# Altium PCB PCB_SX126x_Antenna.PcbDoc
Units mm, origin at the board's own origin, x right, y up, seen from the top; angles counter-clockwise.
Board outline 44 x 40.6 mm, 2 copper layers (Top Layer, Bottom Layer); 41 components, 32 nets, 124 pads, 204 vias.
Unrouted connection lines stored in the file: 4.
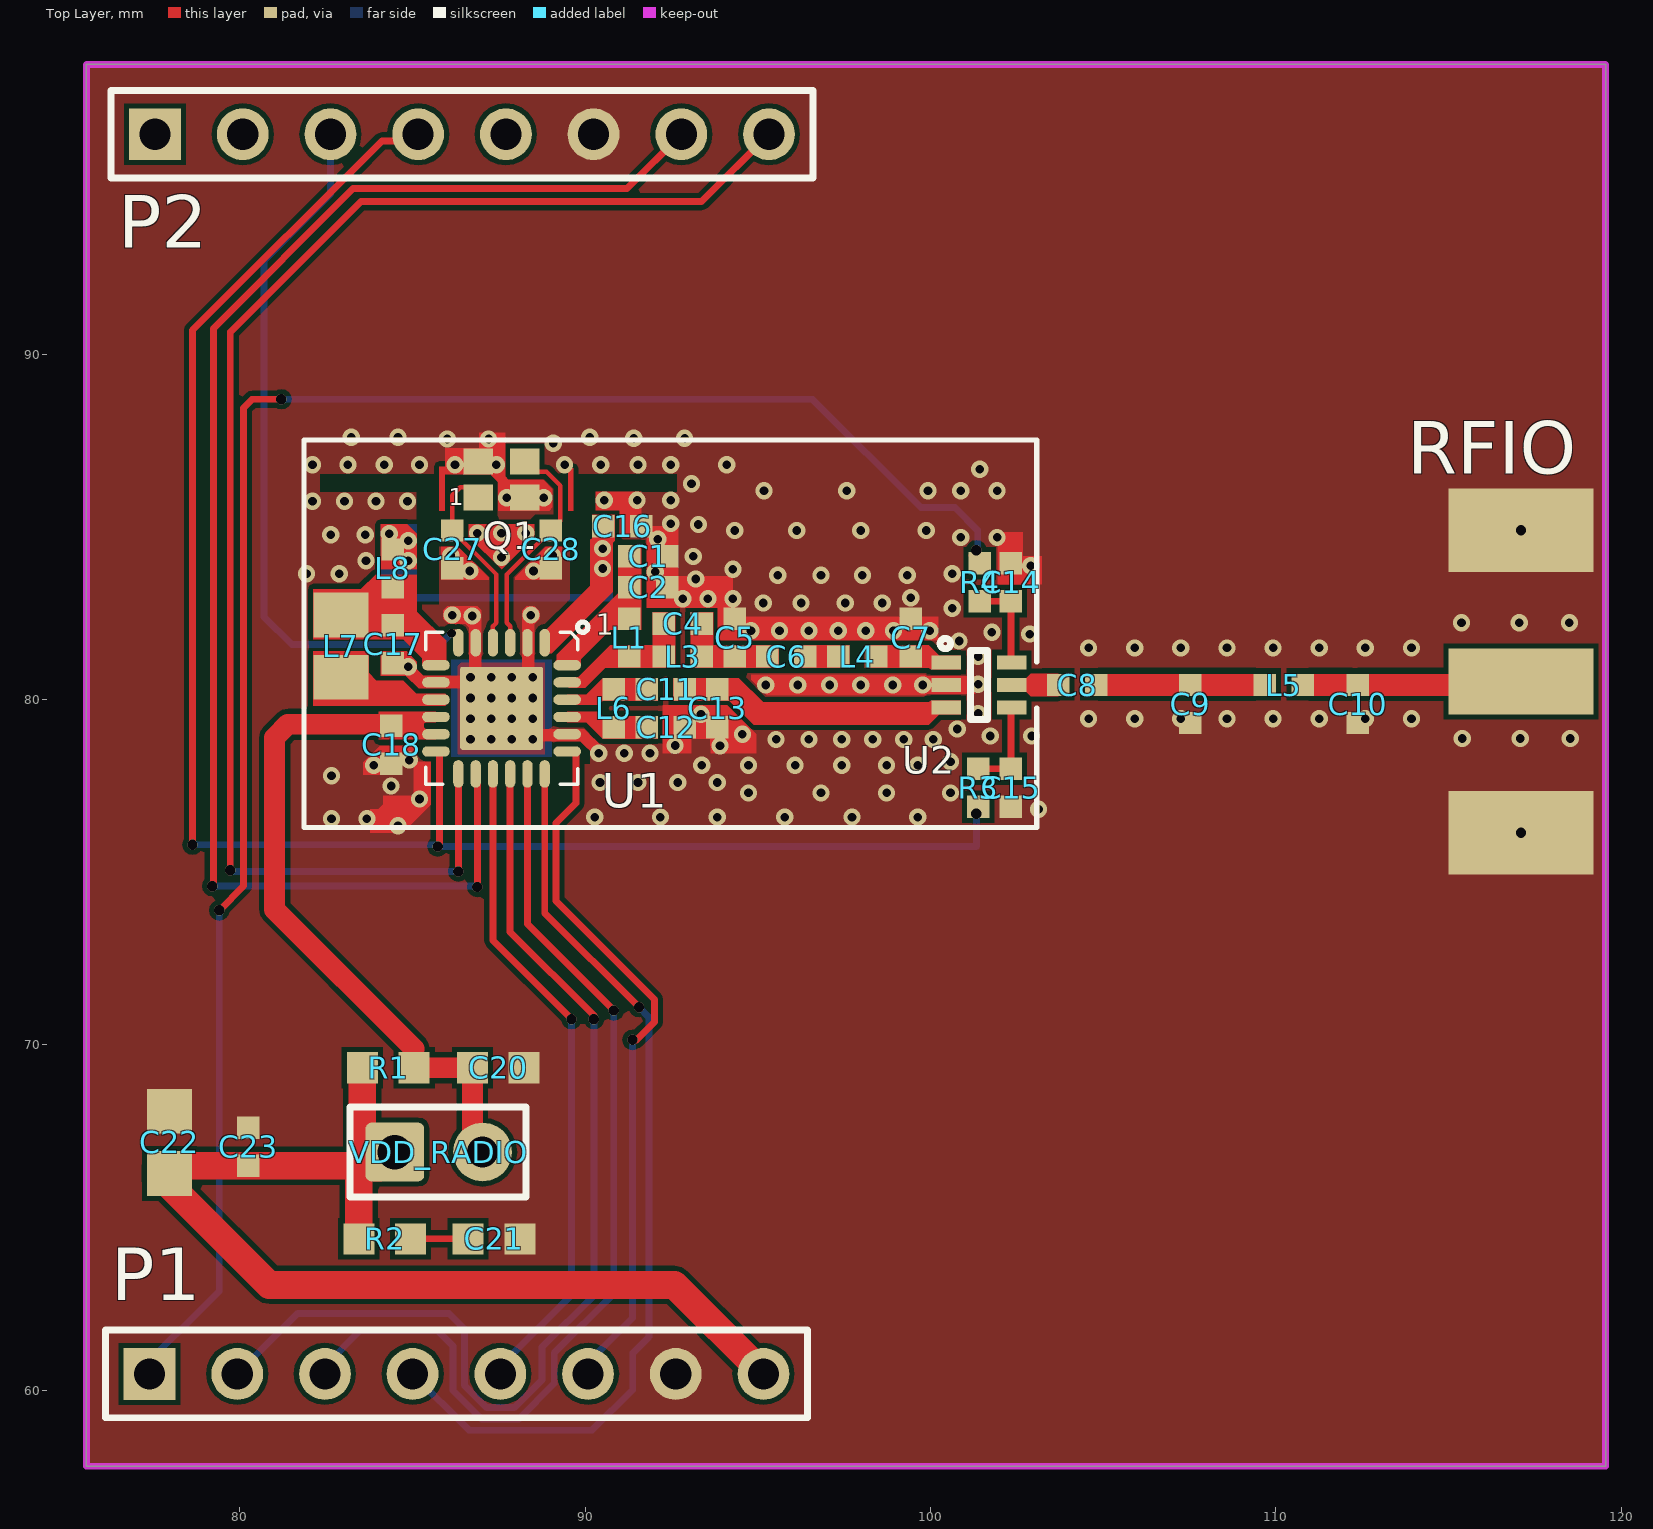
[diagram p0: Top Layer view]
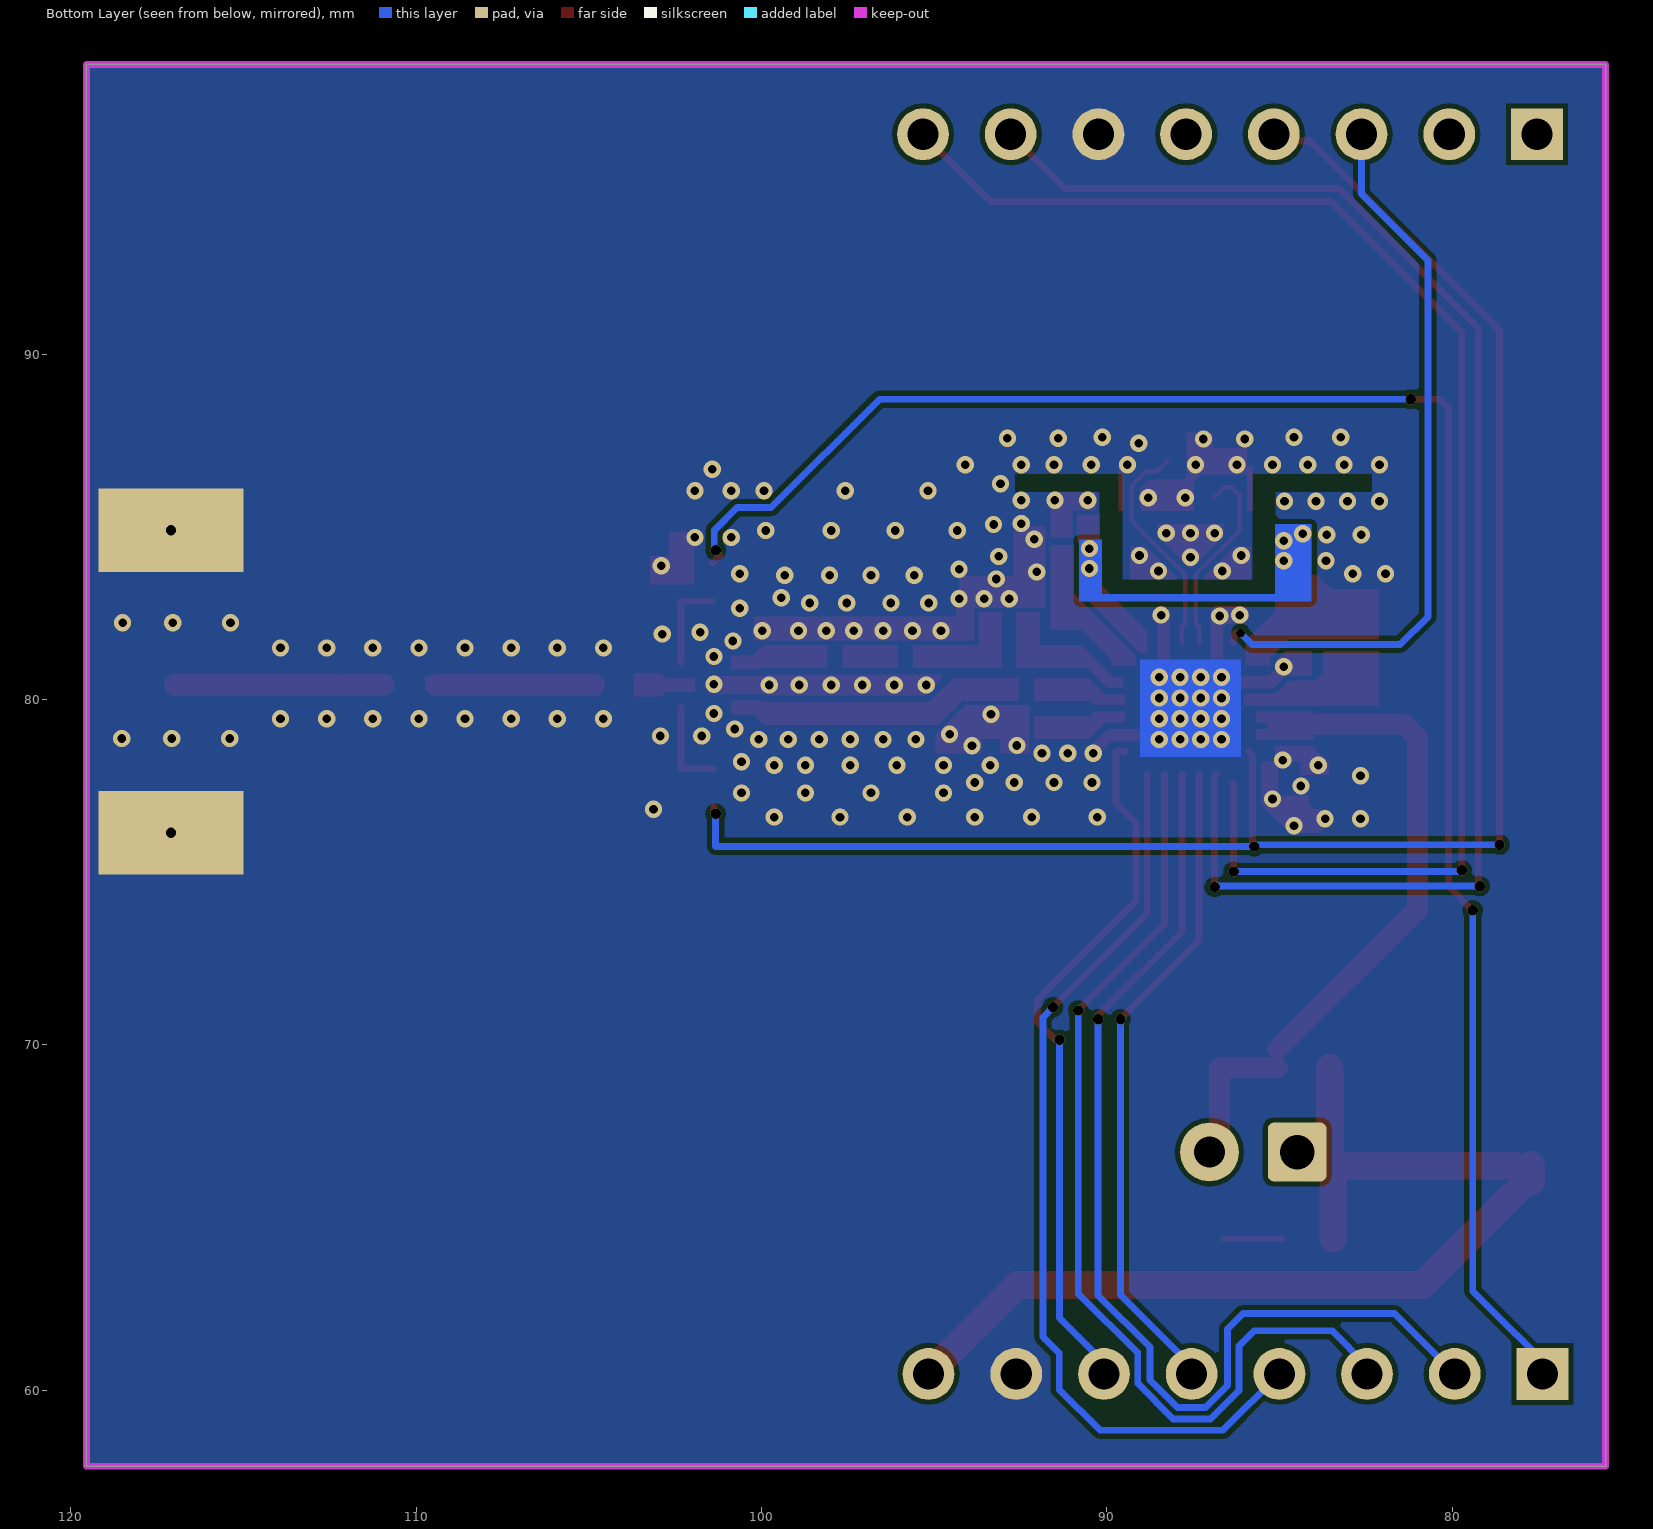
[diagram p1: Bottom Layer view, seen from below]

## Layer stack, top to bottom
Top Solder: solder mask 0.0102, Solder Resist, Dk 3.5
Top Layer: signal copper 0.0356
Dielectric 1: dielectric 0.32, FR-4, Dk 4.8
Bottom Layer: signal copper 0.0356
Bottom Solder: solder mask 0.0102, Solder Resist, Dk 3.5

## Board outline
75.55,57.8 75.55,98.4 119.55,98.4 119.55,57.8

## Design rules (kind name [scope] priority, off if disabled: settings)
Clearance sadasf [InNamedPolygon('Top Layer-No Net')] p1: gap=0.134 ignorepadtopadclearanceinfootprint=FALSE
Clearance sadfsfs [InNamedPolygon('Top Layer-No Net')] p2: gap=0.134 ignorepadtopadclearanceinfootprint=FALSE
Clearance dss [InNamedPolygon('NONET_L02_P002')] p3: gap=0.131 ignorepadtopadclearanceinfootprint=FALSE
Clearance dsds [InNamedPolygon('Top Layer-No Net')] p4: gap=0.254 ignorepadtopadclearanceinfootprint=FALSE except(0: Arc-Hole Track-Hole SMDPad-Hole THPad-Hole Via-Hole Fill-Hole Poly-Hole Region-Hole Text-Hole)
Clearance Clearance_RF_GND [InNet('GND') And OnLayer('Top Layer') And (InPoly) vs InNet('NetL*') or InNet('NetC*') or InNet('NetU*')] p5: gap=0.14 ignorepadtopadclearanceinfootprint=FALSE except(0: Arc-Hole Track-Hole SMDPad-Hole THPad-Hole Via-Hole Fill-Hole Poly-Hole Region-Hole Text-Hole)
Clearance Clearance_GND_Keepout [InNet('GND') vs OnLayer('Keep-Out Layer')] p6: gap=0.25 ignorepadtopadclearanceinfootprint=FALSE
Clearance Clearance_GND [InNet('GND')] p7: gap=0.14 ignorepadtopadclearanceinfootprint=FALSE except(0: Arc-Hole Track-Hole SMDPad-Hole THPad-Hole Via-Hole Fill-Hole Poly-Hole Region-Hole Text-Hole)
Clearance [All] p8: gap=0.127 ignorepadtopadclearanceinfootprint=FALSE
PolygonConnect dfsga [All vs IsNamedPolygon('GND_L02_P004')] p1: connectstyle=Direct reliefconductorwidth=0.254 reliefentries=4 polygonreliefangle="90 Angle" airgapwidth=0.254
PolygonConnect adg [All vs IsNamedPolygon('GND_L01_P003')] p2: connectstyle=Direct reliefconductorwidth=0.254 reliefentries=4 polygonreliefangle="90 Angle" airgapwidth=0.254
PolygonConnect asfdg [All vs IsNamedPolygon('Top Layer-No Net')] p3: connectstyle=Direct reliefconductorwidth=0.254 reliefentries=4 polygonreliefangle="90 Angle" airgapwidth=0.254
PolygonConnect PolygonConnect_1 [All vs IsNamedPolygon('NONET_L02_P002')] p4: connectstyle=Direct reliefconductorwidth=0.254 reliefentries=4 polygonreliefangle="90 Angle" airgapwidth=0.254
PolygonConnect sadf [All vs IsNamedPolygon('NONET_L01_P001')] p5: connectstyle=Direct reliefconductorwidth=0.254 reliefentries=4 polygonreliefangle="90 Angle" airgapwidth=0.254
PolygonConnect fdsad [All vs IsNamedPolygon('Top Layer-No Net')] p6: connectstyle=Direct reliefconductorwidth=0.254 reliefentries=4 polygonreliefangle="90 Angle" airgapwidth=0.254
PolygonConnect [All] p7: connectstyle=Relief reliefconductorwidth=0.254 reliefentries=4 polygonreliefangle="90 Angle" airgapwidth=0.254
RoutingVias [All] p1: holewidth=0.3 width=0.3 viastyle="Through Hole" minholewidth=0.3 minwidth=0.3 maxholewidth=0.4 maxwidth=0.4
SolderMaskExpansion [All] p1: expansion=0.102
Width Width_VCC [InNet('VDD_IN')] p1: maxlimit=2 minlimit=0.2 preferedwidth=0.8 minimp=50.000000 maximp=50.000000 favimp=50.000000
Width Width_All [All] p2: maxlimit=2 minlimit=0.127 preferedwidth=0.2 minimp=50.000000 maximp=50.000000 favimp=50.000000
Width Width_GND [InNet('GND')] p3: maxlimit=3 minlimit=0.2 preferedwidth=0.4 toplayer_minwidth=0.3 minimp=50.000000 maximp=50.000000 favimp=50.000000
30 further rules are at their usual default settings.

## Components (designator, comment, footprint, x,y, rotation, side; value= is the part's Value field where it differs from the comment)
C1 "Cap" RLC_402_SMD 91.825,84.15 r180 top value=NC
C2 "Cap" RLC_402_SMD 91.825,83.25 r180 top value=NC
C4 "Cap" RLC_402_SMD 92.825,82.2 r180 top value=NC
C5 "Cap" RLC_402_SMD 94.325,81.8 r270 top value=NC
C6 "Cap" RLC_402_SMD 95.825,81.25 r180 top value=NC
C7 "Cap" RLC_402_SMD 99.425,81.8 r270 top value=NC
C8 "Cap" rlc_402_smd 104.25,80.425 r180 top value=NC
C9 "Cap" rlc_402_smd 107.525,79.875 r90 top value=NC
C10 "Cap" rlc_402_smd 112.375,79.875 r90 top value=NC
C11 "Cap" RLC_402_SMD 92.325,80.3 r180 top value=NC
C12 "Cap" RLC_402_SMD 92.325,79.2 r180 top value=NC
C13 "Cap" RLC_402_SMD 93.825,79.75 r90 top value=NC
C14 "Cap" RLC_402_SMD 102.325,83.4 r90 top value=1nF
C15 "Cap" RLC_402_SMD 102.325,77.45 r270 top value=1nF
C16 "Cap" RLC_402_SMD 91.075,85.025 r180 top value=10nF
C17 "Cap" RLC_402_SMD 84.425,81.6 r90 top value=470nF
C18 "Cap" RLC_402_SMD 84.375,78.7 r90 top value=100nF
C20 "Cap" rlc_603_smd 87.481,69.341 r180 top value=1uF
C21 "Cap" rlc_603_smd 87.354,64.388 r180 top value=1uF
C22 "Cap" rlc_805_smd 77.956,67.182 r270 top value=10uF
C23 "Cap" rlc_402_smd 80.242,67.055 r270 top value=100nF
C27 "Cap" RLC_402_SMD 86.15,84.35 r90 top value=NC
C28 "Cap" RLC_402_SMD 89,84.35 r270 top value=NC
L1 "Inductor" RLC_402_SMD 91.275,81.8 r90 top value=0R
L3 "Inductor" RLC_402_SMD 92.825,81.25 r0 top value=0R
L4 "Inductor" RLC_402_SMD 97.875,81.25 r0 top value=0R
L5 "Inductor" rlc_402_smd 110.225,80.425 r0 top value=0R
L6 "Inductor" RLC_402_SMD 90.825,79.75 r90 top value=0R
L7 "Inductor" "rlc_805_smd enlarged" 82.925,81.55 r270 top value=15uH
L8 "Inductor" rlc_402_smd 84.425,83.8 r270 top value=47nH
P1 "Header 8" HDR1X8 77.38,60.475 r0 top
P2 "Header 8" HDR1X8 77.54,96.375 r0 top
Q1 "Xtal" ND2016DA 87.575,86.375 r0 top value=32.0MHz
R1 "Resistor" rlc_603_smd 84.294,69.341 r180 top value=NC
R2 "Resistor" rlc_603_smd 84.191,64.388 r180 top value=0R
R3 "Resistor" RLC_402_SMD 101.375,77.45 r270 top value=100R
R4 "Resistor" RLC_402_SMD 101.425,83.4 r90 top value=100R
RFIO "SMA" SMA_end_launch_1.0mm_9.52mm 117.1,80.525 r0 top
U1 "SX1261" VQFN24_4X4MM 87.575,79.75 r270 top
U2 "PE4259 RF Switch" SC70-6 101.4,80.425 r0 top
VDD_RADIO "Jumper" bridge_254mm 84.485,66.9 r0 top

## Footprints (in the part's own frame and the unit in brackets; to place one, negate y for a bottom-side part, rotate by r counter-clockwise, add the part's x,y. Pads: shape width x height; smd on the part's side, far side on the other; paste and mask are expansions set on the pad)
bridge_254mm [mm] "Generic Bridge 2.54mm, 2 Leads 0.9mm;"
  rrect20% 1.7x1.7 hole 1 paste-2539.97 mask+0.05: 1(0,0)
  round 1.7 hole 0.9 paste-2539.97 mask+0.05: 2(2.54,0)
  silkscreen extent -1.3,-1.3 3.8,1.3
HDR1X8 [mm] "Connector; Header; 8 Position"
  rect 1.5x1.5 hole 0.9: 1(0,0)
  round 1.5 hole 0.9: 2(2.54,0) 3(5.08,0) 4(7.62,0) 5(10.16,0) 6(12.7,0) 7(15.24,0) 8(17.78,0)
  silkscreen extent -1.27,-1.27 19.05,1.27
ND2016DA [mm] "Crystal SMD 2.0x1.6mm"
  rect 0.85x0.75 smd mask+0.05: 1(-0.675,-0.525) 2(0.675,-0.525) 3(0.675,0.525) 4(-0.675,0.525)
  body extent -1,-0.8 1,0.8, height 1
RLC_402_SMD [mm] "Chip SMD component 402; Body 1.0 x 0.5 mm (LxW typ)"
  rect 0.65x0.65 smd mask+0.05: 1(-0.55,0) 2(0.55,0)
  body extent -0.87,-0.33 0.87,0.33, height 0.8
rlc_402_smd [mm] "Chip SMD component 402; Body 1.0 x 0.5 mm (LxW typ)"
  rect 0.65x0.65 smd mask+0.05: 1(-0.55,0) 2(0.55,0)
  body extent -0.87,-0.33 0.87,0.33, height 0.8
rlc_603_smd [mm] "Chip SMD component 603; Body 1.6 x 0.8mm (LxW typ)"
  rect 0.9x0.9 smd paste+0 mask+0.05: 1(-0.75,0) 2(0.75,0)
rlc_805_smd [mm] "Chip SMD component 805; Body 2.0 x 1.25 mm (LxW typ)"
  rect 1.3x1.3 smd mask+0.05: 1(-0.9,0) 2(0.9,0)
"rlc_805_smd enlarged" [mm] "Chip SMD component 805; Body 2.0 x 1.25 mm (LxW typ)"
  rect 1.3x1.6 smd mask+0.05: 1(-0.9,0) 2(0.9,0)
SC70-6 [mm] "SC70 6-Leads, Body 2.0x1.25mm, Pitch 0.65mm"
  rect 0.85x0.4 smd mask+0.05: 1(-0.95,0.65) 2(-0.95,0) 3(-0.95,-0.65) 4(0.95,-0.65) 5(0.95,0) 6(0.95,0.65)
  silkscreen extent -1.12,-1 0.25,1.35, body extent -0.63,-1 0.63,1, height 1.45
SMA_end_launch_1.0mm_9.52mm [mm] "SMA end launch for 1.0mm PCB thickness; 9.52mm"
  rect 4.2x1.905 smd mask+0.05: 1(0,0)
  rect 4.2x2.413 hole 0.3 mask+0.05: 2(0,-4.38) 2(0,4.38)
VQFN24_4X4MM [mm] "24 Leads, Body 4.0x4.0mm, Pitch 0.50mm, VQFN24"
  oval 0.8x0.3 smd mask+0.05: 1(-1.9,1.25) 2(-1.9,0.75) 3(-1.9,0.25) 4(-1.9,-0.25) 5(-1.9,-0.75) 6(-1.9,-1.25) 13(1.9,-1.25) 14(1.9,-0.75) 15(1.9,-0.25) 16(1.9,0.25) 17(1.9,0.75) 18(1.9,1.25)
  oval 0.3x0.8 smd mask+0.05: 7(-1.25,-1.9) 8(-0.75,-1.9) 9(-0.25,-1.9) 10(0.25,-1.9) 11(0.75,-1.9) 12(1.25,-1.9) 19(1.25,1.9) 20(0.75,1.9) 21(0.25,1.9) 22(-0.25,1.9) 23(-0.75,1.9) 24(-1.25,1.9)
  rrect5% 2.4x2.4 smd paste-2.5 mask+0.05: 25(0,0)
  Mechanical 15 keep-out lines w0.1: 2.5,-2.5 2.5,2.5 -2.5,2.5 -2.5,-2.5 2.5,-2.5
  silkscreen extent -2.5,-2.2 2.2,2.5, body extent -2,-2 2,2, height 1

## Part data
C1 C2 C4 C5 C6 C7 C8 C9 C10 C11 C12 C13 C14 C15 C16 C17 C18 C20 C21 C22 C23 C27 C28: "Capacitor SMD", LatestRevisionDate="05-oct-2007  -  Semtech", LatestRevisionNote="Re-released for DXP Platform.", Published=8-Jun-2000, Publisher="Altium Limited"
L1 L3 L4 L5 L6 L7 L8: "Inductor SMD", Code_IEC=1005, Code_JEITA=0402, LatestRevisionDate="05-oct-2007  -  Semtech", LatestRevisionNote="Re-released for DXP Platform.", Published=8-Jun-2000, Publisher="Altium Limited"
P1 P2: "Header, 8-Pin", LatestRevisionDate=17-Jul-2002, LatestRevisionNote="Re-released for DXP Platform.", Publisher="Altium Limited"
Q1: library part "Xtal GND", "Crystal with GND pins", LatestRevisionDate="05-oct-2007  -  Semtech"
R1 R2 R3 R4: "Resistor SMD - IEC symbol version", LatestRevisionDate="27-Jul-20  -  Semtech"
RFIO: "SMA Straight Connector", LatestRevisionDate="05-oct-2007  -  Semtech", LatestRevisionNote="Re-released for DXP Platform.", Publisher="Altium Limited"
U1: library part SX126x, "SX1261/2 - Ultra low power RF transceiver"
U2: "PE4259 Peregrine RF Switch", LatestRevisionDate="03-Sep-2012 -  Semtech"
VDD_RADIO: "Jumper Wire", LatestRevisionDate="05-oct-2007  -  Semtech"

## Via types
v1: diameter 0.5, hole 0.25, Top Layer to Bottom Layer, tented both sides, 172 vias
v2: diameter 0.5, hole 0.25, Top Layer to Bottom Layer, tented top, 16 vias
v3: diameter 0.3, hole 0.3, Top Layer to Bottom Layer, 15 vias
v4: diameter 0.25, hole 0.25, Top Layer to Bottom Layer, tented both sides, 1 vias

## Nets (pads, with @x,y where several pads share a name; then routed paths per layer and width w, separated by ;. In a path a pad name is that pad's centre, name@x,y a point inside that pad or via, vN(x,y) a via of type N, cw(c..) or ccw(c..) an arc to the next point about the centre after c; other vN are vias at no path point)
ANT_SW: P1.1 R4.2 | length 54.2
  Top Layer w0.2: v3(79.4,73.9) 80.1,74.6 80.1,88.45 80.35,88.7 v3(81.2,88.7) ; v3(101.324,84.324) 101.324,84.299 101.2,84.175 R4.2
  Bottom Layer w0.2: P1.1 77.065,60.16 76.875,60.35 79.4,62.875 v3(79.4,73.9) ; v3(81.2,88.7) 96.582,88.7 99.722,85.56 100.708,85.56 101.365,84.903 101.365,84.365 v3(101.324,84.324)
BUSY: P2.7 U1.14 | length 43
  Top Layer w0.2: v3(79.2,74.6) 79.227,74.627 79.227,90.752 83.275,94.8 91.205,94.8 P2.7 ; U1.14 86.875,77.8 v3(86.875,74.575)
  Bottom Layer w0.2: v3(79.2,74.6) 86.85,74.6 v3(86.875,74.575)
DIO1: P2.8 U1.13 | length 42.7
  Top Layer w0.2: v3(79.719,75.056) 79.719,90.644 83.5,94.425 93.37,94.425 P2.8 ; v3(86.325,75.025) U1.13@86.325,77.575
  Bottom Layer w0.2: v3(79.719,75.056) 79.75,75.025 v3(86.325,75.025)
DIO2: P2.4 R3.2 U1.12 | length 50.5
  Top Layer w0.2: v3(78.625,75.8) 78.625,90.7 84.11,96.185 84.97,96.185 P2.4 ; v3(85.725,75.75) 85.775,75.8 85.775,78.4 U1.12@85.875,78.5 ; v3(101.325,76.7) 101.375,76.75 R3.2
  Bottom Layer w0.2: v3(78.625,75.8) 85.675,75.8 v3(85.725,75.75) 101.325,75.75 v3(101.325,76.7)
DIO3: P2.3 U1.6 | length 21.1
  Top Layer w0.2: v4(86.124,81.929) 86.269,81.929 86.325,81.873 U1.6
  Bottom Layer w0.2: P2.3 82.62,94.645 80.7,92.725 80.7,82.4 81.5,81.6 85.795,81.6 v4(86.124,81.929)
GND: C1.1 C2.1 C5.1 C7.1 C9.1 C10.1 C12.1 C13.1 C14.2 C15.2 C16.1 C17.1 C18.1 C20.1 C21.1 C22.1 C23.1 C27.1 C28.2 P1.7 P2.6 Q1.2 Q1.4 RFIO.2 U1.2 U1.5 U1.8 U1.20 U1.25 U2.2 | length 4.1
  Top Layer w0.3: U1.8 U1.25@86.675,80.5 ; U1.25@86.825,80.6 U1.5 ; U1.25@88.325,80.65 U1.2 ; U1.25@88.475,78.95 88.525,79 U1.20
  other v1: 84.575,76.35 82.65,76.55 83.675,76.55 90.275,76.6 92.175,76.6 93.825,76.6 95.775,76.6 97.725,76.6 99.625,76.6 103.125,76.825 85.2,77.125 94.725,77.3 96.825,77.3 98.725,77.3 100.575,77.3 84.375,77.5 90.425,77.6 91.525,77.6 92.675,77.6 93.825,77.6 82.65,77.8 83.875,78.1 93.375,78.1 94.725,78.1 96.075,78.1 97.425,78.1 98.725,78.1 99.625,78.1 100.575,78.2 84.9,78.25 90.391,78.45 91.125,78.45 91.875,78.45 92.6,78.675 93.9,78.669 95.525,78.85 96.475,78.85 97.425,78.85 98.325,78.85 99.225,78.85 100.075,78.85 115.4,78.875 117.075,78.875 118.525,78.875 101.725,78.95 102.925,78.95 94.55,79 100.775,79.15 104.575,79.45 105.911,79.45 107.247,79.45 108.582,79.45 109.918,79.45 111.254,79.45 112.589,79.45 113.925,79.45 93.35,79.575 101.375,79.6 95.225,80.425 96.15,80.425 97.075,80.425 97.975,80.425 98.9,80.425 99.775,80.425 101.375,80.45 84.875,80.95 101.375,81.25 104.575,81.5 105.911,81.5 107.247,81.5 108.582,81.5 109.918,81.5 111.254,81.5 112.589,81.5 113.925,81.5 100.825,81.7 102.875,81.9 101.775,81.95 94.8,82 95.625,82 96.475,82 97.325,82 98.125,82 98.925,82 99.975,82 115.375,82.225 117.05,82.225 118.5,82.225 86.725,82.425 86.15,82.45 88.425,82.45 100.625,82.65 95.15,82.8 96.25,82.8 97.525,82.8 98.6,82.8 92.825,82.925 93.55,82.925 94.275,82.925 99.425,82.95 93.2,83.495 95.575,83.6 96.825,83.6 98.025,83.6 99.325,83.6 81.925,83.65 82.875,83.65 100.625,83.65 92.025,83.7 86.65,83.725 88.5,83.725 94.275,83.775 102.9,83.875 83.65,84.025 87.575,84.125 93.125,84.15 86.1,84.175 89.05,84.175 92.1,84.65 100.875,84.7 101.925,84.7 82.625,84.775 83.625,84.775 86.875,84.825 87.575,84.825 88.275,84.825 94.325,84.9 96.125,84.9 97.975,84.9 99.875,84.9 93.275,85.075 92.475,85.1 82.1,85.75 83.025,85.75 83.94,85.75 84.85,85.75 90.55,85.775 91.5,85.775 92.475,85.775 87.725,85.85 88.8,85.85 95.175,86.05 97.575,86.05 99.925,86.05 100.875,86.05 101.925,86.05 93.075,86.25 101.425,86.675 82.1,86.8 83.125,86.8 84.175,86.8 85.2,86.8 86.225,86.8 87.425,86.8 89.4,86.8 90.45,86.8 91.525,86.8 92.475,86.8 94.1,86.8 89.075,87.425 86,87.55 87.2,87.55 91.4,87.575 92.875,87.575 83.225,87.6 84.575,87.6 90.125,87.6
  other v2: 86.675,78.85 87.275,78.85 87.875,78.85 88.475,78.85 86.675,79.45 87.275,79.45 87.875,79.45 88.475,79.45 86.675,80.05 87.275,80.05 87.875,80.05 88.475,80.05 86.675,80.65 87.275,80.65 87.875,80.65 88.475,80.65
MISO: P1.2 U1.16 | length 31.2
  Top Layer w0.2: U1.16 87.825,73.275 90.25,70.85 v3(90.25,70.75)
  Bottom Layer w0.2: P1.2 81.67,62.225 86.05,62.225 86.5,61.775 86.5,60.133 87.135,59.498 87.945,59.498 88.75,60.303 88.75,61.25 90.25,62.75 v3(90.25,70.75)
MOSI: P1.3 U1.17 | length 28.9
  Top Layer w0.2: P1.3 P1.3@82.46,60.71 ; U1.17 88.325,73.5 v3(90.825,71)
  Bottom Layer w0.2: P1.3@82.46,60.71 83.475,61.725 85.725,61.725 86.173,61.277 86.173,59.998 87,59.171 88.08,59.171 89.1,60.191 89.1,61.075 90.825,62.8 v3(90.825,71)
NetC4_1: C4.1 C5.2 C6.2 L3.2
NetC4_2: C4.2 L1.1 L3.1 U1.23
NetC6_1: C6.1 L4.1
NetC7_2: C7.2 L4.2 U2.1
NetC8_1: C8.1 C9.2 L5.1 | length 5
  Top Layer w0.2: C8.1@104.8,80.45 C8.1@104.85,80.4 ; L5.1@109.42,80.35 L5.1@109.664,80.594
  Top Layer w0.65: C8.1@104.85,80.425 C9.2 L5.1@109.42,80.425
NetC8_2: C8.2 U2.5
NetC10_2: C10.2 L5.2 RFIO.1 | length 6.5
  Top Layer w0.2: L5.2@110.764,80.594 L5.2@110.957,80.4 ; C10.2@112.214,80.4 C10.2@112.375,80.4 ; RFIO.1@116.975,80.4 RFIO.1
  Top Layer w0.65: L5.2@110.957,80.425 C10.2@112.214,80.425 ; C10.2 RFIO.1@116.975,80.425
NetC11_1: C11.1 C13.2 U2.3
NetC11_2: C11.2 L6.2 U1.22
NetC12_2: C12.2 L6.1 U1.21
NetC14_1: C14.1 R4.1 U2.6 | length 2.7
  Top Layer w0.2: R4.1 C14.1 ; U2.6@102.325,81.075 C14.1 ; C14.1@102.35,82.85 C14.1
NetC15_1: C15.1 R3.1 U2.4 | length 2.7
  Top Layer w0.2: R3.1 C15.1 U2.4@102.325,79.775
NetC16_2: C16.2 L8.1 U1.1
  other v1: 90.5,83.8 84.875,84.025 90.5,84.375 84.875,84.6 84.325,84.805
NetC17_2: C17.2 L7.1 L8.2 U1.7
NetC21_2: C21.2 R2.1 | length 1.7
  Top Layer w0.2: R2.1 C21.2
NetL7_2: L7.2 U1.9
NSS: P1.6 U1.19 | length 20.6
  Top Layer w0.2: U1.19 89.725,78.5 89.725,77.002 89.152,76.429 89.152,74.173 92.002,71.323 92.002,70.669 91.483,70.15 v3(91.367,70.15)
  Bottom Layer w0.2: P1.6 90.08,60.805 91.367,62.092 v3(91.367,70.15)
SCK: P1.4 U1.18 | length 26.8
  Top Layer w0.2: U1.18 88.825,73.826 v3(91.556,71.095)
  Bottom Layer w0.2: P1.4 86.631,58.844 90.194,58.844 91.375,60.025 91.375,61.075 91.85,61.55 91.85,70.801 v3(91.556,71.095)
SX_NRESET: P1.5 U1.15 | length 19.2
  Top Layer w0.2: U1.15 87.325,73.025 v3(89.6,70.75) ; P1.5 P1.5@87.54,60.704
  Bottom Layer w0.2: P1.5@87.54,60.704 89.6,62.764 v3(89.6,70.75)
VDD_IN: C22.2 C23.2 P1.8 R1.2 R2.2 VDD_RADIO.1 | length 32.6
  Top Layer w0.8: R2.2 83.441,66.402 83.489,66.45 84.035,66.45 VDD_RADIO.1@84.09,66.505 ; 83.544,66.9 R1.2 ; VDD_RADIO.1 VDD_RADIO.1@84.09,66.505 ; P1.8 92.585,63.05 80.85,63.05 77.787,66.113 77.712,66.038 77.712,66.525 C22.2 78.179,66.505 C23.2 VDD_RADIO.1@84.09,66.505
VDD_RADIO: C18.2 C20.2 R1.1 U1.10 U1.11 VDD_RADIO.2 | length 19
  Top Layer w0.2: C18.2@84.333,79.292 C18.2 ; R1.1 85.044,69.881
  Top Layer w0.6: C18.2@84.333,79.292 81.392,79.292 81,78.9 81,73.925 85.044,69.881 ; R1.1 C20.2 86.731,67.194 VDD_RADIO.2
VR_PA: C1.2 C2.2 L1.2 U1.24
XTA: C28.1 Q1.3 U1.3 | length 6.5
  Top Layer w0.127: U1.3 87.825,82.125 87.725,82.225 87.725,83.625 C28.1 ; Q1.3 88.55,86.6 88.875,86.6 89.275,86.2 89.275,85.175 C28.1
XTB: C27.2 Q1.1 U1.4 | length 5.8
  Top Layer w0.127: Q1.1 86.6,86.15 86.375,86.15 86.15,85.925 C27.2 87.425,83.625 87.425,82.225 87.325,82.125 U1.4
pads on no net: P2.1 P2.2 P2.5

## Polygon pours and split planes (outlines as drawn)
GND on Top Layer "GND_L01_P003" (solid, pour order 3): 75.55,57.8 75.55,98.4 119.55,98.4 119.55,57.8
GND on Bottom Layer "GND_L02_P004" (solid, pour order 4): 75.55,57.8 75.55,98.4 119.55,98.4 119.55,57.8

## Keep-outs
Keep-Out Layer:
  the board outline again, w0.2

## Other copper
Top Layer:
  region net NetC8_2: 103.7,80.75 102.9,80.75 102.775,80.625 101.925,80.625 101.925,80.225 102.775,80.225 102.9,80.1 103.7,80.1
  pour cut-out: 89.55,82.75 89.55,86.525 92.65,86.525 92.65,86.025 90.3,86.025 90.3,82.75
  region net GND: 87.475,85.475 87.475,86.3 87.25,86.525 85.95,86.525 85.95,87.275 86.925,87.275 86.925,87.725 87.675,87.725 87.676,86.474 87.775,86.375 88.775,86.375 89.05,86.1 89.05,85.575 88.95,85.475
  pour cut-out: 82.325,86.025 85.125,86.025 85.125,82.75 85.775,82.75 85.775,86.525 82.325,86.525
  region net NetC16_2: 84.075,83.775 84.075,85.075 84.85,85.075 85.125,84.8 85.125,83.775
  region net GND: 88.175,80.65 88.175,82.575 88.3,82.7 88.525,82.7 88.675,82.55 88.675,82.341 88.525,82.191 88.525,80.65
  region net GND: 86.988,80.65 86.988,82.588 86.875,82.7 86,82.7 85.888,82.588 85.888,82.338 86.025,82.2 86.525,82.2 86.638,82.088 86.638,80.65
  region net GND: 85.825,84.425 86.3,84.425 87.2,83.525 87.2,83.475 85.825,83.475
  region net GND: 89.325,84.425 88.85,84.425 87.968,83.543 87.968,83.475 89.325,83.475
  region: 86.625,84.725 86.625,85.075 88.525,85.075 88.525,84.725 87.575,83.775
  region net GND: 94.8,80.725 94.8,80.575 95.25,80.125 99.85,80.125 99.9,80.175 101.3,80.175 101.3,80.675 99.9,80.675 99.85,80.725
  region net NetC11_1: 92.55,80.625 92.55,79.975 94.175,79.975 94.875,79.275 99.95,79.275 100.25,79.575 100.875,79.575 100.875,79.975 100,79.975 99.95,79.925 95.15,79.925 94.45,80.625
  region net VR_PA: 89.875,81 89.875,81.175 90.725,82.025 91.625,82.025 91.625,83.15 91.025,83.15 89.175,81.3 89.175,81.15 89.15,81.125 89.15,81
  pour cut-out: 90.125,79 90.391,78.734 90.495,78.734 90.495,78.77 90.265,79
  region net GND: 101.95,84.85 101.95,83.35 103.225,83.35 103.225,84.15 102.675,84.15 102.675,84.85
  region net GND: 83.575,78.185 84.04,78.65 85.125,78.65 85.125,78.2 84.375,78.2 84.375,77.825 83.575,77.825
  region net VDD_RADIO: 84.025,78.85 85.675,78.85 85.675,79.15 85.375,79.15 85.325,79.2 85.325,79.3 85.375,79.35 85.675,79.35 85.675,79.65 84.025,79.65
  region net NetC17_2: 83.975,83.625 85.125,83.625 85.125,82.55 85.975,81.7 85.975,81.1 85.975,81 85.275,81 85.275,81.2 83.974,82.502
  region net NetC17_2: 82.125,83.2 83.498,83.2 83.931,83.625 84.05,83.625 85.325,82.35 85.325,81.75 82.125,81.75
  pour cut-out: 101.785,81.45 102.109,81.45 102.109,81.4 101.885,81.4 101.885,79.435 101.785,79.435
  region net NetC7_2: 100.875,80.875 100,80.875 99.95,80.925 99.65,80.925 99.65,81.575 99.95,81.575 100.25,81.275 100.875,81.275
  pour cut-out: 90.133,78.15 90.133,78.542 89.875,78.8 89.875,78.2 89.925,78.15
  region net GND: 100.225,81.715 93.84,81.715 93.84,82.85 94.35,82.85 94.35,82.4 100.225,82.4
  region net GND: 91.81,82.665 94.325,82.665 94.325,83.025 91.81,83.025
  region net NetC7_2: 98.1,81.575 98.1,80.925 99.75,80.925 99.75,81.575
  region net NetC6_1: 96.05,81.575 97.65,81.575 97.65,80.925 96.05,80.925
  region net NetC4_1: 93.05,80.925 95.6,80.925 95.6,81.575 93.05,81.575
  region net NetC4_1: 93.05,82.525 93.7,82.525 93.7,80.925 93.05,80.925
  region net NetC4_2: 92.6,82.525 91.95,82.525 91.95,80.925 92.6,80.925
  region net NetC12_2: 89.475,79.65 90.375,79.65 90.5,79.525 92.1,79.525 92.1,78.875 90.5,78.875 90.025,79.35 89.475,79.35
  region net NetC11_2: 89.475,80.15 90.025,80.15 90.5,80.625 92.1,80.625 92.1,79.975 90.5,79.975 90.375,79.85 89.475,79.85
  region net NetC4_2: 89.525,80.35 90,80.35 90.575,80.925 92.6,80.925 92.6,81.575 90.725,81.575 89.8,80.65 89.525,80.65
  region net GND: 85.525,78.2 85.525,76.955 85.37,76.8 85.025,76.8 85.025,78.2
  region net GND: 88.475,79.15 89.975,79.15 90.5,78.625 90.5,78.375 90.283,78.375 89.858,78.8 88.475,78.8
  region net GND: 84.075,81.4 84.075,80.7 84.8,80.7 85.175,80.325 86.675,80.325 86.675,80.7 85.3,80.7 85.125,80.875 85.125,81.1 84.825,81.4
  region net NetL7_2: 86.025,80.1 85.95,80.175 85.1,80.175 84.725,80.55 83.95,80.55 83.725,80.775 83.725,81.4 82.125,81.4 82.125,79.825 85.95,79.825 86.025,79.9
  pour cut-out: 88.961,78.425 88.917,78.425 86.175,78.425 86.177,78.294 88.961,78.294
  pour cut-out: 88.961,78.375 88.825,78.375 88.825,81.075 86.15,81.076 86.15,81.199 88.955,81.202 88.957,81.2
  pour cut-out: 86.3,81.175 86.3,78.4 86.15,78.4 86.15,81.175
  region net GND: 84.151,77.216 85.525,77.216 85.525,76.955 84.711,76.141 83.776,76.141 83.776,76.825 84.01,76.825 84.151,76.966
  region net VR_PA: 90.95,84.475 91.625,84.475 91.625,82.025 90.95,82.025
  region net GND: 94.275,82.665 91.775,82.665 91.775,85.025 92.695,85.025 92.695,83.571 94.275,83.571
  region net GND: 92.24,79.835 94.115,79.835 94.95,79 94.95,78.447 93.628,78.447 93.624,78.875 93.075,78.875 93.075,78.447 92.24,78.447
  pour cut-out: 92.025,78.734 92.24,78.734 92.24,78.8 92.025,78.8
  pour cut-out: 94.625,80.784 100,80.784 100,80.85 94.625,80.85
  pour cut-out: 93.825,81.715 100.005,81.715 100.005,81.65 93.825,81.65
  region: 85.925,86.75 85.925,85.475 85.775,85.475 85.775,86.75
  region: 89.5,85.475 89.65,85.475 89.65,86.7 89.5,86.7
  pour cut-out: 85.625,86.525 89.875,86.525 89.875,86.375 85.625,86.375
  region net NetC16_2: 88.825,81.35 88.825,81.975 90.15,83.3 90.15,84.625 90.2,84.675 90.2,85.35 90.8,85.35 90.85,85.35 90.85,84.6 90.8,84.55 90.8,83.125 89.025,81.35
  region net GND: 90.3,86.025 90.3,85.491 91,85.491 91,84.7 91.625,84.7 91.625,86.025
  pour cut-out: 84.775,85.216 85.135,85.216 85.135,85.2 84.775,85.2
Bottom Layer:
  pour cut-out: 82.325,86.025 85.125,86.025 85.125,82.75 85.775,82.75 85.775,86.525 82.325,86.525
  pour cut-out: 89.55,82.8 89.55,86.525 92.65,86.525 92.65,86.025 90.2,86.025 90.2,82.8
  pour cut-out: 85,82.75 85,83.475 89.7,83.475 89.7,83 89.45,82.75
  region net GND: 86.125,81.15 86.125,78.35 89.025,78.35 89.025,81.15
  region net NetC16_2: 84.075,85.075 84.075,82.85 90.8,82.85 90.8,84.625 90.15,84.625 90.15,83.05 85.125,83.05 85.125,85.075

## Silkscreen, mask and mechanical layers (free items; w line width, h text height)
Top Overlay:
  lines w0.15: 103.075,79.75 103.075,76.3 81.85,76.3 81.85,87.525 103.075,87.525 103.075,81.1

## Text inside footprints (layer, text, board x,y; h text height)
Q1: Top Overlay "1" at 86.05,85.625 h0.5
U1: Top Overlay "1" at 90.3,81.875 h0.6